# Altium PCB Mach_khuech_dai_am_thanh.PcbDoc
Units mm, origin at the board's own origin, x right, y up, seen from the top; angles counter-clockwise.
Board outline 134.62 x 83.19 mm, 2 copper layers (Top Layer, Bottom Layer); 45 components, 27 nets, 103 pads, 1 vias.
Unrouted connection lines stored in the file: 51.
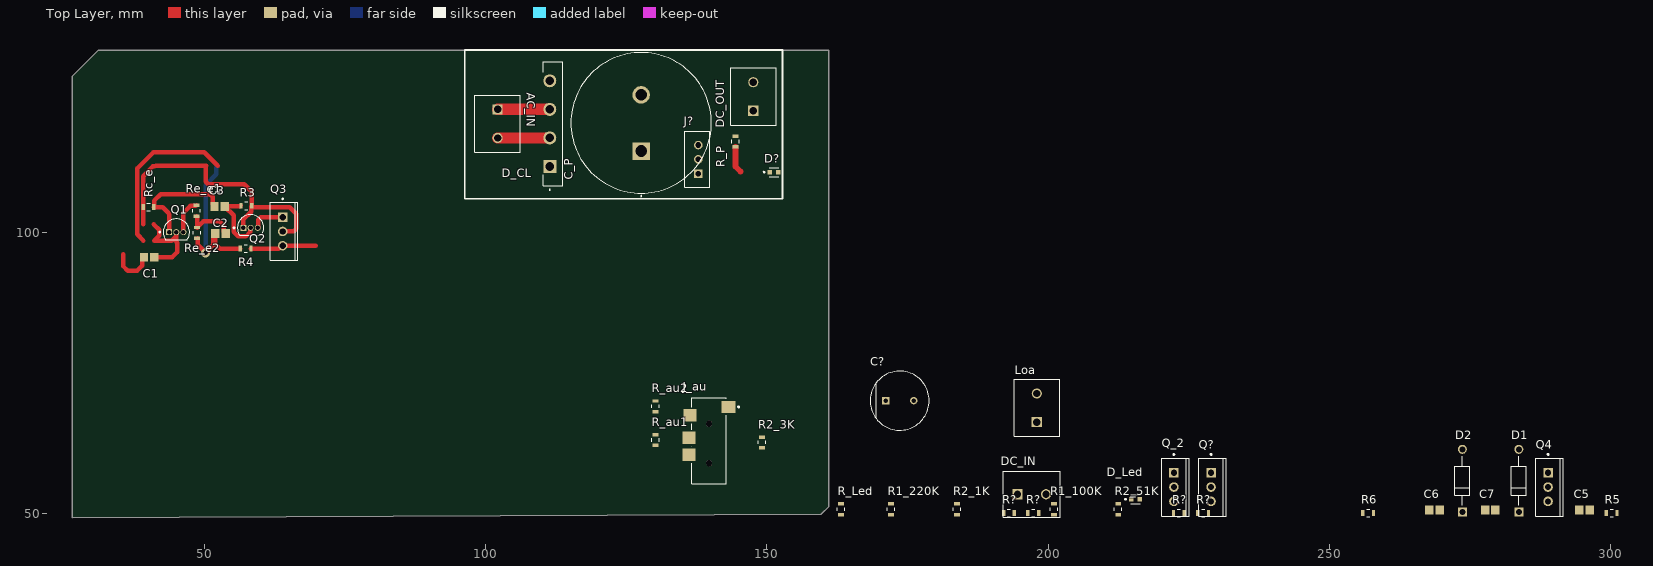
[diagram p0: Top Layer view]
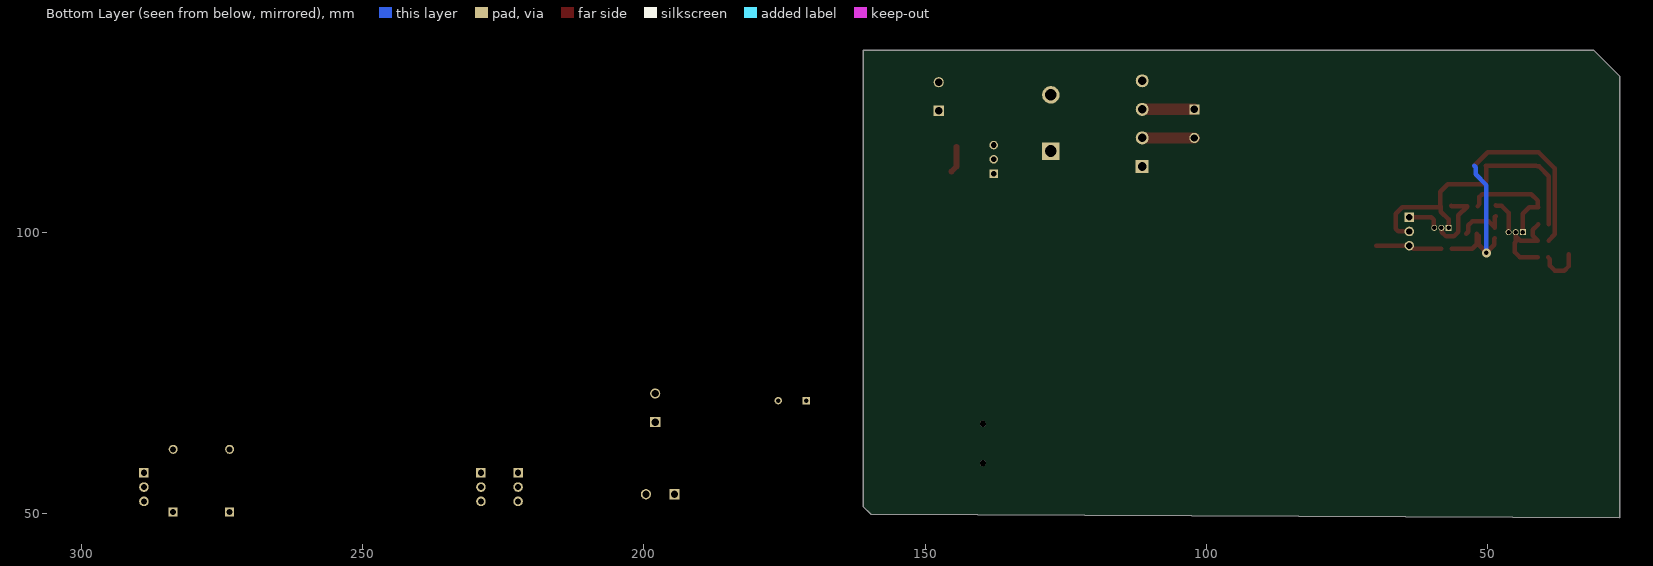
[diagram p1: Bottom Layer view, seen from below]

## Layer stack, top to bottom
Top Solder: solder mask 0.0102, Solder Resist, Dk 3.5
Top Layer: signal copper 0.0356
Dielectric 1: dielectric 0.32, FR-4, Dk 4.8
Bottom Layer: signal copper 0.0356
Bottom Solder: solder mask 0.0102, Solder Resist, Dk 3.5

## Board outline
159.639,49.911 161.036,51.308 161.036,132.461 31.115,132.461 26.416,127.762 26.416,49.276

## Design rules (kind name [scope] priority, off if disabled: settings)
Clearance Clearance_1 [All] p1: gap=0.254 ignorepadtopadclearanceinfootprint=FALSE
Clearance [All] p2: gap=15 ignorepadtopadclearanceinfootprint=FALSE
PolygonConnect [All] p1: connectstyle=Relief reliefconductorwidth=0.254 reliefentries=4 polygonreliefangle="90 Angle" airgapwidth=0.254
RoutingVias [All] p1: holewidth=0.711 width=1.27 viastyle="Through Hole" minholewidth=0.711 minwidth=1.27 maxholewidth=0.711 maxwidth=1.27
SolderMaskExpansion [All] p1: expansion=0.102 istentingtop=FALSE
SupplyNets "Schematic Supply Nets" [InNet('R2-')] p1: voltage=0.000
SupplyNets "Schematic Supply Nets_2" [InNet('R1+')] p2: voltage=0.000
Width [All] p1: maxlimit=2 minlimit=0.2 preferedwidth=0.4
30 further rules are at their usual default settings.

## Classes and differential pairs
component class Mach_khuech_dai_am_thanh: AC_IN C1 C2 C3 C5 C6 C7 C? C_P D1 D2 D? D_CL D_Led DC_IN DC_OUT J? J_au Loa Q1 Q2 Q4 Q? Q_2 R1_100K R1_220K R2_1K R2_3K R2_51K R3 R4 R5 R6 R? R_au1 R_au2 R_Led R_P Rc_e Re_e1 Re_e2

## Components (designator, comment, footprint, x,y, rotation, side; value= is the part's Value field where it differs from the comment)
AC_IN "1729128" PHOE-1729128-2_V 102.108,119.38 r270 top
C1 "104" CAPC2013X145X48ML20T23 40.132,95.631 r0 top
C2 "VJ0805Y682KXAMT" CAPC2013X145X48ML20T23 52.832,99.822 r0 top
C3 "104" CAPC2013X145X48ML20T23 52.669,104.648 r0 top
C5 "104" CAPC2013X145X48ML20T23 295.402,50.673 r0 top
C6 "104" CAPC2013X145X48ML20T23 268.732,50.673 r0 top
C7 "104" CAPC2013X145X48ML20T23 278.638,50.673 r0 top
C? "EEUFC1A821" FP-RAD-TH-D_10_0_5-L_16_1-MFG 173.609,70.104 r0 top
C_P "MAL225631472E3" CAP_MAL225631472E3 127.635,119.507 r90 top
D1 "1N4007-TP" FP-1N4007-TP-MFG 283.718,55.88 r90 top
D2 "1N4007-TP" FP-1N4007-TP-MFG 273.685,55.88 r90 top
D? "LTST-C191TBKT" FP-LTST-C191TBKT-MFG 151.257,110.744 r0 top
D_CL "GBU606" SIP343W114P508L2205H2134Q4 111.939,119.38 r90 top
D_Led "LTST-C191TBKT" FP-LTST-C191TBKT-MFG 215.519,52.578 r0 top
DC_IN "1729128" PHOE-1729128-2_V 197.104,53.467 r0 top
DC_OUT "" PHOE-1729128-2_V 147.574,124.206 r90 top
J? "LM7818CT" TO-220-3 137.795,113.03 r90 top
J_au "SJ2-3574A-SMT-TR" FP-SJ2-3574A-SMT-TR-MFG 139.7,62.992 r90 top
Loa "1729128" PHOE-1729128-2_V 197.993,68.834 r90 top
Q1 "BC547C" ONSC-TO-92-3-29-11 44.958,100.076 r0 top
Q2 "BC547C" ONSC-TO-92-3-29-11 58.166,100.838 r0 top
Q3 "TIP122" ONSC-TO-220-3-221A-09 63.881,100.203 r0 top
Q4 "TIP41CG" ONSC-TO-220-3-221A-09 288.925,54.737 r0 top
Q? "TIP41CG" ONSC-TO-220-3-221A-09 228.981,54.737 r0 top
Q_2 "TIP42CG" ONSC-TO-220-3-221A-09 222.377,54.737 r0 top
R1_100K "100K" FP-RK73H2A-MFG 201.041,50.8 r90 top
R1_220K "220K" FP-RK73H2A-MFG 172.085,50.8 r90 top
R2_1K "1K" FP-RK73H2A-MFG 183.769,50.8 r90 top
R2_3K "3K" FP-RK73H2A-MFG 149.098,62.677 r90 top
R2_51K "51K" FP-RK73H2A-MFG 212.471,50.8 r90 top
R3 "1270K" FP-RK73H2A-MFG 57.404,104.775 r0 top
R4 "75" FP-RK73H2A-MFG 57.277,97.155 r0 top
R5 "1660" FP-RK73H2A-MFG 300.228,50.165 r0 top
R6 "1660" FP-RK73H2A-MFG 256.921,50.165 r0 top
R? "100K" FP-RK73H2A-MFG 227.584,50.165 r0 top
R? "220K" FP-RK73H2A-MFG 193.04,50.165 r0 top
R? "220K" FP-RK73H2A-MFG 197.358,50.165 r0 top
R? "100K" FP-RK73H2A-MFG 223.266,50.165 r0 top
R_au1 "4.7K" FP-RK73H2A-MFG 130.175,63.119 r90 top
R_au2 "4.7K" FP-RK73H2A-MFG 130.175,69.088 r90 top
R_Led "1K" FP-RK73H2A-MFG 163.195,50.8 r90 top
R_P "2.2k" FP-RK73H2A-MFG 144.399,116.205 r90 top
Rc_e "3K" FP-RK73H2A-MFG 40.005,104.521 r180 top
Re_e1 "87" FP-RK73H2A-MFG 48.514,103.886 r90 top
Re_e2 "663" FP-RK73H2A-MFG 48.641,99.949 r90 top

## Footprints (in the part's own frame and the unit in brackets; to place one, negate y for a bottom-side part, rotate by r counter-clockwise, add the part's x,y. Pads: shape width x height; smd on the part's side, far side on the other; paste and mask are expansions set on the pad)
CAP_MAL225631472E3 [mm]
  rect 3.116x3.116 / inner round 3.116 / far side rect 3.116x3.116 hole 2.1: 1(-5,0)
  round 3.116 hole 2.1: 2(5,0)
  silkscreen extent -13.1,-12.5 12.5,12.5
CAPC2013X145X48ML20T23 [mm] "Chip Capacitor, 2-Leads, Body 2.00x1.25mm, IPC Low Density"
  rect 1.5x1.55 smd: 1(-0.925,0) 2(0.925,0)
  body extent -1.1,-0.72 1.1,0.72, height 1.45
FP-1N4007-TP-MFG [mm]
  rect 1.6x1.6 hole 1.05 paste-2539.97 mask+0: 1(-5.57,0)
  round 1.6 hole 1.05 paste-2539.97 mask+0: 2(5.57,0)
  silkscreen extent -4.37,-1.35 4.37,1.35, body extent -6.47,-1.45 6.47,1.45, height 0.25
FP-LTST-C191TBKT-MFG [mm]
  rect 0.8x0.8 smd paste+0 mask+0: 1(-0.75,0) 2(0.75,0)
  silkscreen extent -1.87,-0.8 0.85,0.8, body extent -1.25,-0.55 1.25,0.55, height 0.25
FP-RAD-TH-D_10_0_5-L_16_1-MFG [mm]
  rect 1.3x1.3 hole 0.8 paste-2539.97 mask+0: 1(-2.5,0)
  round 1.3 hole 0.8 paste-2539.97 mask+0: 2(2.5,0)
  silkscreen extent -5.25,-5.25 5.25,5.25, body extent -5.35,-5.35 5.35,5.35, height 0.25
FP-RK73H2A-MFG [mm]
  rect 0.6x1.05 smd paste+0 mask+0: 1(-0.95,0) 2(0.95,0)
  silkscreen extent -0.28,-0.67 0.28,0.67, body extent -1.35,-0.77 1.35,0.77, height 0.25
FP-SJ2-3574A-SMT-TR-MFG [mm]
  rect 2.2x2.5 smd paste+0 mask+0: 1(6,-3.45)
  rect 2.2x2.3 smd paste+0 mask+0: 2(4.5,3.35) 3(0.5,3.55) 4(-2.5,3.55)
  round 1.1 hole 1.1 unplated paste-2539.97 mask+0: ""(-4,0) ""(3,0)
  silkscreen extent -7.65,-5.38 7.65,3.05, body extent -7.75,-4.8 7.75,4.8, height 0.25
ONSC-TO-92-3-29-11 [mm] "TO, 3-Leads, Body Dia 4.7mm, Pitch 1.27mm"
  rect 1.05x1.05 hole 0.8: 1(-1.27,0)
  round 1.05 hole 0.8: 2(0,0) 3(1.27,0)
  silkscreen extent -3.07,-1.34 2.35,2.35, body extent -2.35,-1.33 2.36,2.36, height 7.87
ONSC-TO-220-3-221A-09 [mm] "FM, 3-Leads, Body 10.3x4.85mm, Pitch 2.54mm"
  rect 1.7x1.7 hole 1.1: 1(0,2.54)
  round 1.7 hole 1.1: 2(0,0) 3(0,-2.54)
  silkscreen extent -2.2,-5.15 2.7,5.92, body extent -2.18,-5.15 2.67,5.15, height 19.85
PHOE-1729128-2_V [mm] "Receptacle, 2-Leads, Body 8.1x10.16mm, Pitch 5.08mm"
  rect 1.8x1.8 hole 1.3: 1(-2.54,0)
  round 1.8 hole 1.3: 2(2.54,0)
  silkscreen extent -5.08,-4.05 5.08,4.05, body extent -5.65,-4.05 5.08,4.05, height 10.01
SIP343W114P508L2205H2134Q4 [mm]
  round 2.31 hole 1.54: AC1(-2.54,0.56) AC2(2.54,0.56) NEG(7.62,0.56)
  rect 2.31x2.31 / inner round 2.31 / far side rect 2.31x2.31 hole 1.54: POS(-7.62,0.56)
  silkscreen extent -11.86,-1.72 11.02,1.72, body extent -11.02,-1.72 11.02,1.72, height 21.55
TO-220-3 [mm]
  rect 1.508x1.508 / inner round 1.508 / far side rect 1.508x1.508 hole 1: 1(-2.54,0)
  round 1.508 hole 1: 2(0,0) 3(2.54,0)
  silkscreen extent -4.98,-2.03 4.98,2.41, body extent -4.98,-1.76 4.98,2.69, height 19.68

## Part data
AC_IN DC_IN Loa: library part CMP-2000-05815-1, "PCB Terminal Block, 13.5 A, 400 V, 2-Pin THD, RoHS, Bulk", Current Rating=13500mA, Manufacturer="Phoenix Contact", Package Description="2-Pin Through Hole Device, Body 8.1 x 10.16 mm, Pitch 5.08 mm", Package Reference=1729128-2, Package Version=03/2015, Voltage Rating=400V, Datasheet URL=https://datasheet.ciiva.com/16046/1729128-16046181.pdf, Datasheet Version=12/2013, Manufacturer URL=http://www.phoenixcontact.com/, Mounting Technology=ThroughHole, No. of Positions=2, No. of Rows=1, Orientation=Horizontal, Package URL=https://www.phoenixcontact.com/online/portal/pi/pxc/product_detail_page/!ut/p/b1/3VdJjqNKFDxLH8AFycySyWY2ozFsEPOMMQaDOX1XedGL_1Vdm5YXJleknhSKeBkvI6EA8ncAo3AYoDhBQGco6KN7VURTdemj9us_IEKEZo_YHiPAEWEFmDGOHMORkqKYCORBZxgL7ZoaZYcbFFUZ3fqxSY6GOuxydWUuHqz1ynmMFygu583Bob0Ewr6Sd_l-5m-kAueHiB0jpRwZwe58wwtkpxtMYd_LmGcDRU02dRNEyWt6Y2ti5pSyJ_reIkzIulrqApdnbT11V5jnCKbYNCvhEM1MCpPByat_X379-iThf08CI5GfOPqfBeS3BRoBOdD55AKVv0iLwCMq-2BrzXWSGRH7pUGD9uwXQjiph3xL0DKQwdGa0JImiIOmBNOestqgwTHSSs2oOep-78apyXQBvNi8ZLaFjvjWvcaUEBu0MC6Wbe-d6mB0FAebo2lUWinqYaZs5DAYzV0RP9yitUjnGJ0iI9xhZkT42OCQNUJJhkgWINNQLP2JFP6OpMg3JCVg70jqHT0lvKOnhHf0lPuOnnLf0VPuWx6_dxwUIvwk5WMkT0kLL1mh61l2yZVSzG3pYV_bqo-mj6uMKwKwdnnW8Jh5RTOJzMOA5c-eJDaZQw4mTMPH02PvS_ZAqNVjVTo2WyYLkwH_KU1mmmG5kjRhDqPXLwwVHvVOjCM60-fpXvTDfMGW1PVFVS1r4e4yVDk4ZdNbkUHvqPqQSeian4UD39fNKmachqdJ1NJbyk8rXT9mXTvPk3oE5meulKGgiruPJek-4I9hTT6G8ZLOyRSm2RRVbThERQad5OS28hdt4YW4vG0stgYYzsWsK4_7y6DZMjJSCqri1kyiZR5vD7pwIrNR7QwPHTcLTI5qT7eRlpHrdGiupYlqQDJ7zy_CND8fWWBoLRXxk1RVcXiBQwbTD4Xi7KL-FuO94t9xaqweXzH, Packing=Bulk, PartNumber=1729128, Pitch=5.08mm, RoHS=TRUE
C1 C3 C5 C6 C7: library part CMP-2007-03205-1, Manufacturer=Vitramon, Part Number=VJ0805Y682KXAMT
C2: library part CMP-2007-03205-1, Manufacturer=Vitramon, Part Number=VJ0805Y682KXAMT
C?: library part CMP-05427-000510-1, "Aluminum Electrolytic Capacitors (Radial Lead Type) AEC-Q200 Qualified 820uF ±20% 10V", Capacitance=820uF, Case/Package=Radial, Dielectric Material=Aluminium, ESR (Equivalent Series Resistance)=68mR, Leakage Current=3uA, Max Operating Temperature=105°C, Min Operating Temperature=-55°C, Package Quantity=200, Ripple Current=1.05A, Tolerance=20%, Voltage=10V, Construction=RADIAL, Diameter=10mm, Height=16mm, Height - Seated (Max)=0.63inch, Impedance=68mR, Lead Diameter=0.6mm, Lead Free="Lead Free", Lead Pitch=5mm, Length=16mm, Life (Hours)=3000Hour, Mount="Through Hole", Number of Pins=2, Packaging=Bulk, Radiation Hardening=No, REACH SVHC="No SVHC", Ripple Current (AC)=1.05A, RoHS Compliant=Yes, Series=FC, Termination=Radial, Voltage Rating=10V, Voltage Rating (DC)=10V
C_P: Package=None, Availability=Unavailable, MP=MAL225631472E3, Price=None
D1 D2: library part CMP-56207-000011-1, "DIODE GEN PURP 1KV 1A DO41", Average Rectified Current=1A, Capacitance=15pF, Case/Package=DO-41, Forward Voltage=1V, Max Forward Surge Current (Ifsm)=30A, Max Operating Temperature=150°C, Max Repetitive Reverse Voltage (Vrrm)=1kV, Max Reverse Current=5uA, Min Operating Temperature=-55°C, Package Quantity=1, Current Rating=1A, Diameter=2.7mm, Element Configuration=Single, Forward Current=1A, Lead Free="Lead Free", Length=5.2mm, Max Reverse Voltage (DC)=1kV, Max Surge Current=30A, Mount="Through Hole", Number of Pins=2, Output Current=1A, Packaging="Tape and Reel", Peak Non-Repetitive Surge Current=30A, Polarity=Standard, Radiation Hardening=No, Recovery Time=2000ns, Reverse Recovery Time=2us, Reverse Voltage=1kV, RoHS Compliant=Yes, Voltage Rating (DC)=1kV
D? D_Led: library part CMP-22017-000008-1, "LED BLUE CLEAR CHIP SMD", Case Code (Imperial)=0603, Case Code (Metric)=1608, Color=Blue, Forward Current=20mA, Forward Voltage=3.8V, Lens Color=Colorless, Max Operating Temperature=80°C, Max Power Dissipation=75mW, Min Operating Temperature=-20°C, Package Quantity=1, Power Dissipation=76mW, Reverse Voltage=5V, Case/Package=0603, Depth=1.6mm, Dominant Wavelength=475nm, Height=0.55mm, Illumination Color=Blue, Lead Free="Lead Free", Length=0.8mm, Lens Style=Diffused, Lens Transparency=Clear, Luminous Intensity=180mcd, Mount="Surface Mount", Number of Elements=1, Number of LEDs=1, Number of Pins=2, Packaging="Tape and Reel", Radiation Hardening=No, Test Current=20mA, Viewing Angle=130°, Wavelength=468nm, Width=0.8mm
D_CL: "6A 600V Bridge Rectifier Case GBU", Package="SIP-4 Diodes Incorporated", Check_prices=https://www.snapeda.com/parts/GBU606/Diodes+Inc./view-part/?ref=eda, MF="Diodes Inc.", MP=GBU606, SnapEDA_Link=https://www.snapeda.com/parts/GBU606/Diodes+Inc./view-part/?ref=snap
DC_OUT: library part CMP-2000-05815-1, "PCB Terminal Block, 13.5 A, 400 V, 2-Pin THD, RoHS, Bulk", Current Rating=13500mA, Manufacturer="Phoenix Contact", Package Description="2-Pin Through Hole Device, Body 8.1 x 10.16 mm, Pitch 5.08 mm", Package Reference=1729128-2, Package Version=03/2015, PartNumber=1729128, Voltage Rating=400V, Datasheet URL=https://datasheet.ciiva.com/16046/1729128-16046181.pdf, Datasheet Version=12/2013, Manufacturer URL=http://www.phoenixcontact.com/, Mounting Technology=ThroughHole, No. of Positions=2, No. of Rows=1, Orientation=Horizontal, Package URL=https://www.phoenixcontact.com/online/portal/pi/pxc/product_detail_page/!ut/p/b1/3VdJjqNKFDxLH8AFycySyWY2ozFsEPOMMQaDOX1XedGL_1Vdm5YXJleknhSKeBkvI6EA8ncAo3AYoDhBQGco6KN7VURTdemj9us_IEKEZo_YHiPAEWEFmDGOHMORkqKYCORBZxgL7ZoaZYcbFFUZ3fqxSY6GOuxydWUuHqz1ynmMFygu583Bob0Ewr6Sd_l-5m-kAueHiB0jpRwZwe58wwtkpxtMYd_LmGcDRU02dRNEyWt6Y2ti5pSyJ_reIkzIulrqApdnbT11V5jnCKbYNCvhEM1MCpPByat_X379-iThf08CI5GfOPqfBeS3BRoBOdD55AKVv0iLwCMq-2BrzXWSGRH7pUGD9uwXQjiph3xL0DKQwdGa0JImiIOmBNOestqgwTHSSs2oOep-78apyXQBvNi8ZLaFjvjWvcaUEBu0MC6Wbe-d6mB0FAebo2lUWinqYaZs5DAYzV0RP9yitUjnGJ0iI9xhZkT42OCQNUJJhkgWINNQLP2JFP6OpMg3JCVg70jqHT0lvKOnhHf0lPuOnnLf0VPuWx6_dxwUIvwk5WMkT0kLL1mh61l2yZVSzG3pYV_bqo-mj6uMKwKwdnnW8Jh5RTOJzMOA5c-eJDaZQw4mTMPH02PvS_ZAqNVjVTo2WyYLkwH_KU1mmmG5kjRhDqPXLwwVHvVOjCM60-fpXvTDfMGW1PVFVS1r4e4yVDk4ZdNbkUHvqPqQSeian4UD39fNKmachqdJ1NJbyk8rXT9mXTvPk3oE5meulKGgiruPJek-4I9hTT6G8ZLOyRSm2RRVbThERQad5OS28hdt4YW4vG0stgYYzsWsK4_7y6DZMjJSCqri1kyiZR5vD7pwIrNR7QwPHTcLTI5qT7eRlpHrdGiupYlqQDJ7zy_CND8fWWBoLRXxk1RVcXiBQwbTD4Xi7KL-FuO94t9xaqweXzH, Packing=Bulk, Pitch=5.08mm, RoHS=TRUE
J?: "Linear Voltage Regulator IC Positive Fixed 1 Output 1A TO-220-3", Package="TO-220-3 ON Semiconductor", Availability="In Stock", Check_prices=https://www.snapeda.com/parts/LM7818CT/Onsemi/view-part/?ref=eda, MF="ON Semiconductor", MP=LM7818CT, Price=None, Purchase-URL=https://pricing.snapeda.com/search/part/LM7818CT/?ref=eda, SnapEDA_Link=https://www.snapeda.com/parts/LM7818CT/Onsemi/view-part/?ref=snap
J_au: library part CMP-14818-000001-1, Current Rating=1A, Manufacturer=CUI, Temperature="-25°C to +85°C", Temperature Range High=+85°C, Temperature Range Low=-25°C, Voltage Rating=12V, Automotive=No, Category=Conn, ComponentLink2Description=Datasheet, ComponentLink2URL=https://www.cui.com/product/resource/sj2-357x-smt.pdf, Conn Orientation=Horizontal, Contact Material=Silver, Device Class L1=Connectors, Device Class L2="Audio / Video Connectors", Device Class L3=unset, Digikey Description="AUDIO JACK, 3.5 MM, RT, 4 CONDUC", Height=5.3mm, Lead Free=Yes, Manufacturer Part Number=SJ2-3574A-SMT-TR, Number of Contacts=4, Octopart=https://octopart.com/sj2-3574a-smt-tr-cui-77838840, Package=SJ2-3574A-SMT-TR, RoHS=TRUE
Q1 Q2: library part CMP-1048-01437-1, "Amplifier Transistor, NPN Silicon, 3-Pin TO-92, Bulk Box", Manufacturer="On Semiconductor", ComponentLink1Description="Manufacturer URL", ComponentLink1URL=http://www.onsemi.com/, ComponentLink2Description=Datasheet, ComponentLink2URL=http://www.onsemi.com/pub_link/Collateral/BC546-D.PDF, ComponentLink3Description="Package Specification", ComponentLink3URL=http://www.onsemi.cn/pub_link/Collateral/2N6426-D.PDF, DatasheetVersion="Rev. 7", fT Min (MHz)=150, IC Continuous (A)=0.1, Mounting Technology="Through Hole", PackageDescription="3-Pin Transistor Outline, Body 4.825 x 3.685 mm, Pitch 1.27 mm", PackageReference=TO-92-3-29-11_AM_SL, PackageVersion="Rev. AM", Packing="Bulk Box", PartNumber=BC547C, Polarity=NPN, RoHS=FALSE
Q3: library part CMP-1047-00126-1, "Plastic Medium-Power, Complementary Silicon Transistor, 3-Pin TO-220, Tube", Manufacturer="On Semiconductor", ComponentLink1Description="Manufacturer URL", ComponentLink1URL=http://www.onsemi.com/, ComponentLink2Description=Datasheet, ComponentLink2URL=http://www.onsemi.cn/pub_link/Collateral/TIP120-D.PDF, ComponentLink3Description="Package Specification", ComponentLink3URL=http://www.onsemi.com/pub_link/Collateral/221A-09.PDF, DatasheetVersion="Rev. 8", IC Continuous (A)=5, Mounting Technology="Through Hole", PackageDescription="3-Pin Flange Mount, Vertical Straight Lead, Body 9.97 x 4.445 mm, Pitch 2.54 mm", PackageReference=TO-220-3-221A-09, PackageVersion="Rev. AG, 09/2011", Packing=Tube, PartNumber=TIP122, Polarity=NPN, RoHS=FALSE
Q4 Q?: library part CMP-1048-01176-1, "Complementary Silicon Plastic Power Transistor, 3-Pin TO-220, Pb-Free, Tube", Manufacturer="On Semiconductor", ComponentLink1Description="Manufacturer URL", ComponentLink1URL=http://www.onsemi.com/, ComponentLink2Description=Datasheet, ComponentLink2URL=http://www.onsemi.com/pub_link/Collateral/TIP41A-D.PDF, ComponentLink3Description="Package Specification", ComponentLink3URL=http://www.onsemi.com/pub_link/Collateral/221A-09.PDF, DatasheetVersion="Rev. 10", fT Min (MHz)=3, IC Continuous (A)=6, Mounting Technology="Through Hole", PackageDescription="3-Pin Flange Mount, Vertical Straight Lead, Body 9.97 x 4.445 mm, Pitch 2.54 mm", PackageReference=TO-220-3-221A-09, PackageVersion="Rev. AG, 09/2011", Packing=Tube, PartNumber=TIP41CG, Polarity=NPN, RoHS=TRUE
Q_2: library part CMP-1048-01106-1, "Complementary Silicon Plastic Power Transistor, 3-Pin TO-220, Pb-Free, Tube", Manufacturer="On Semiconductor", ComponentLink1Description="Manufacturer URL", ComponentLink1URL=http://www.onsemi.com/, ComponentLink2Description=Datasheet, ComponentLink2URL=http://www.onsemi.com/pub_link/Collateral/TIP41A-D.PDF, ComponentLink3Description="Package Specification", ComponentLink3URL=http://www.onsemi.com/pub_link/Collateral/221A-09.PDF, DatasheetVersion="Rev. 10", fT Min (MHz)=3, IC Continuous (A)=6, Mounting Technology="Through Hole", PackageDescription="3-Pin Flange Mount, Vertical Straight Lead, Body 9.97 x 4.445 mm, Pitch 2.54 mm", PackageReference=TO-220-3-221A-09, PackageVersion="Rev. AG, 09/2011", Packing=Tube, PartNumber=TIP42CG, Polarity=PNP, RoHS=TRUE
R1_100K R1_220K R2_1K R2_3K R2_51K R3 R4 R5 R6 R? R? R? R? R_au1 R_au2 R_Led R_P Rc_e Re_e1 Re_e2: library part CMP-04015-103638-1, "732kΩ ±1% 0.25W Chip Resistor 0805 Thick Film AEC-Q200 Qualified", Case Code (Imperial)=0805, Case Code (Metric)=2012, Max Operating Temperature=155°C, Min Operating Temperature=-55°C, Package Quantity=5000, Power Rating=125mW, Resistance=732kR, Temperature Coefficient=100ppm/°C, Tolerance=1%, Voltage Rating=150V, Case/Package=0805, Height=0.5mm, Lead Free="Contains Lead", Length=2mm, Packaging="Tape and Reel", RoHS Compliant=No, Series=RK73H, Termination=SMD/SMT, Voltage Rating (DC)=150V, Width=1.25mm

## Via types
v1: diameter 1.6, hole 0.8, Top Layer to Bottom Layer, 1 vias

## Nets (pads, with @x,y where several pads share a name; then routed paths per layer and width w, separated by ;. In a path a pad name is that pad's centre, name@x,y a point inside that pad or via, vN(x,y) a via of type N, cw(c..) or ccw(c..) an arc to the next point about the centre after c; other vN are vias at no path point)
GND_P: C_P.2 D?.1 D_CL.NEG DC_OUT.1 J?.2
Input_EC: C1.1 R_au1.1 R_au2.1 | length 7.8
  Top Layer w0.8: 35.56,96.139 35.56,93.98 36.322,93.218 37.973,93.218 38.857,94.102 38.857,95.281 C1.1
NetAC_IN_1: AC_IN.1 D_CL.AC2 | length 9.3
  Top Layer w2: AC_IN.1 D_CL.AC2
NetAC_IN_2: AC_IN.2 D_CL.AC1 | length 9.3
  Top Layer w2: AC_IN.2 D_CL.AC1
NetC2_2: C2.2 Re_e1.1 Re_e2.2 | length 9.2
  Top Layer w0.8: Re_e1.1 48.539,102.936 48.639,102.836 48.639,102.811 48.641,102.809 Re_e2.2 48.666,100.899 49.748,101.981 52.705,101.981 53.407,101.279 53.407,100.172 C2.2
NetC3_2: C3.2 Q2.2 R3.1 | length 12.5
  Top Layer w0.8: R3.1 56.454,104.75 56.352,104.648 C3.2 53.594,104.623 55.161,103.056 55.161,100.121 55.968,99.314 57.347,99.314 58.118,100.085 58.118,100.79 Q2.2
NetC5_2: C5.2 D1.2 Q4.1 R5.1
NetC6_2: C6.2 D2.1 Q_2.1 R6.2
NetC7_1: C7.1 Q4.3 Q_2.2
NetD1_1: D1.1 D2.2
NetD?_2: D?.2 R_P.1 | length 4.8
  Top Layer w1: R_P.1 144.399,111.76 145.288,110.871
NetD_Led_2: D_Led.2 R_Led.1
NetJ_au_2: J_au.2 R_au2.2
NetJ_au_3: J_au.3 R_au1.2
NetQ1_3: Q1.3 Re_e1.2 | length 6.3
  Top Layer w0.8: Q1.3 46.228,103.505 47.459,104.736 48.414,104.736 Re_e1.2
NetQ2_3: Q2.3 Q?.1 | length 6
  Top Layer w0.8: Q2.3 59.484,100.886 59.484,102.274 59.952,102.743 63.881,102.743
NetR1_100K_1: R1_100K.1 R1_220K.2
NetR2_1K_1: R2_1K.1 R2_3K.2
NetR2_1K_2: R2_1K.2 R2_51K.1
NetR?_1: R?.1@226.634,50.165 R?.2@198.308,50.165
Out_c: C5.1 C6.1 Q?.3 R4.2
Output_EC: C3.1 Q1.1 Rc_e.1 | length 20.6
  Top Layer w0.8: Q1.1 43.688,103.378 42.545,104.521 Rc_e.1 41.055,104.621 41.055,105.698 42.164,106.807 50.925,106.807 51.394,106.338 51.394,104.998 C3.1
R1+: DC_IN.2 Q2.1 Q4.2 Q?.2 R1_100K.2 R3.2 R5.2 R?.2@224.216,50.165 R?.2@228.534,50.165 R_Led.2 Rc_e.2 | length 53.5
  Top Layer w0.8: 39.055,101.473 Rc_e.2 39.055,110.048 40.767,111.76 41.148,111.76 41.275,111.887 50.308,111.887 50.195,111.774 50.195,110.014 50.165,109.984 50.165,109.054 50.634,108.585 57.023,108.585 58.354,107.254 R3.2 ; Q2.1 56.896,102.362 58.254,103.72 58.254,104.675 R3.2 ; 63.736,100.348 63.881,100.203 65.825,100.203 66.294,100.672 66.294,103.378 65.151,104.521 58.608,104.521 58.479,104.65 58.454,104.65 58.354,104.75 R3.2
R1-: C1.2 Q1.2 R1_220K.1 R2_51K.2 R?.1@192.09,50.165 R?.1@196.408,50.165 | length 16.7
  Top Layer w0.8: 40.986,101.442 40.955,101.473 40.955,101.448 41.91,100.493 41.91,99.471 41.016,98.577 41.016,98.552 44.139,98.552 44.91,99.323 44.91,100.028 Q1.2 44.958,98.328 45.085,98.201 45.085,96.52 44.196,95.631 C1.2
R2-: C2.1 D_Led.1 DC_IN.1 J_au.1 J_au.4 Q_2.3 R2_3K.1 R4.1 R6.1 Re_e2.1 | length 59.7
  Top Layer w0.8: 39.116,98.552 39.116,98.577 38.001,99.692 38.001,111.407 40.894,114.3 49.895,114.3 52.308,111.887 ; Re_e2.1 48.666,98.999 48.766,98.899 48.766,97.822 v1@50.165,96.423 ; v1(50.165,96.393) v1@50.165,96.423 ; C2.1@51.532,99.447 51.532,97.847 50.165,96.48 v1@50.165,96.423 ; C2.1 51.907,97.953 52.705,97.155 R4.1
  Bottom Layer w0.8: v1(50.165,96.393) 50.165,108.458 52.07,110.363 52.07,111.649 52.308,111.887
V_18: DC_OUT.2 J?.3 R_P.2
V_20~: C_P.1 D_CL.POS J?.1
pads on no net: C7.2 C?.1 C?.2 J_au. Loa.1 Loa.2 Q3.1 Q3.2 Q3.3 R?.1@222.316,50.165 R?.2@193.99,50.165
copper on no net: | length 11.7
  Top Layer w0.8: 58.227,97.155 63.129,97.155 63.637,97.663 63.881,97.663 69.723,97.663

## Silkscreen, mask and mechanical layers (free items; w line width, h text height)
Top Overlay:
  lines w0.3: 96.266,106.045 152.781,106.045 152.781,132.461 96.266,132.461 96.266,106.045